# EAGLE board sdunit (EAGLE 6.5.0)
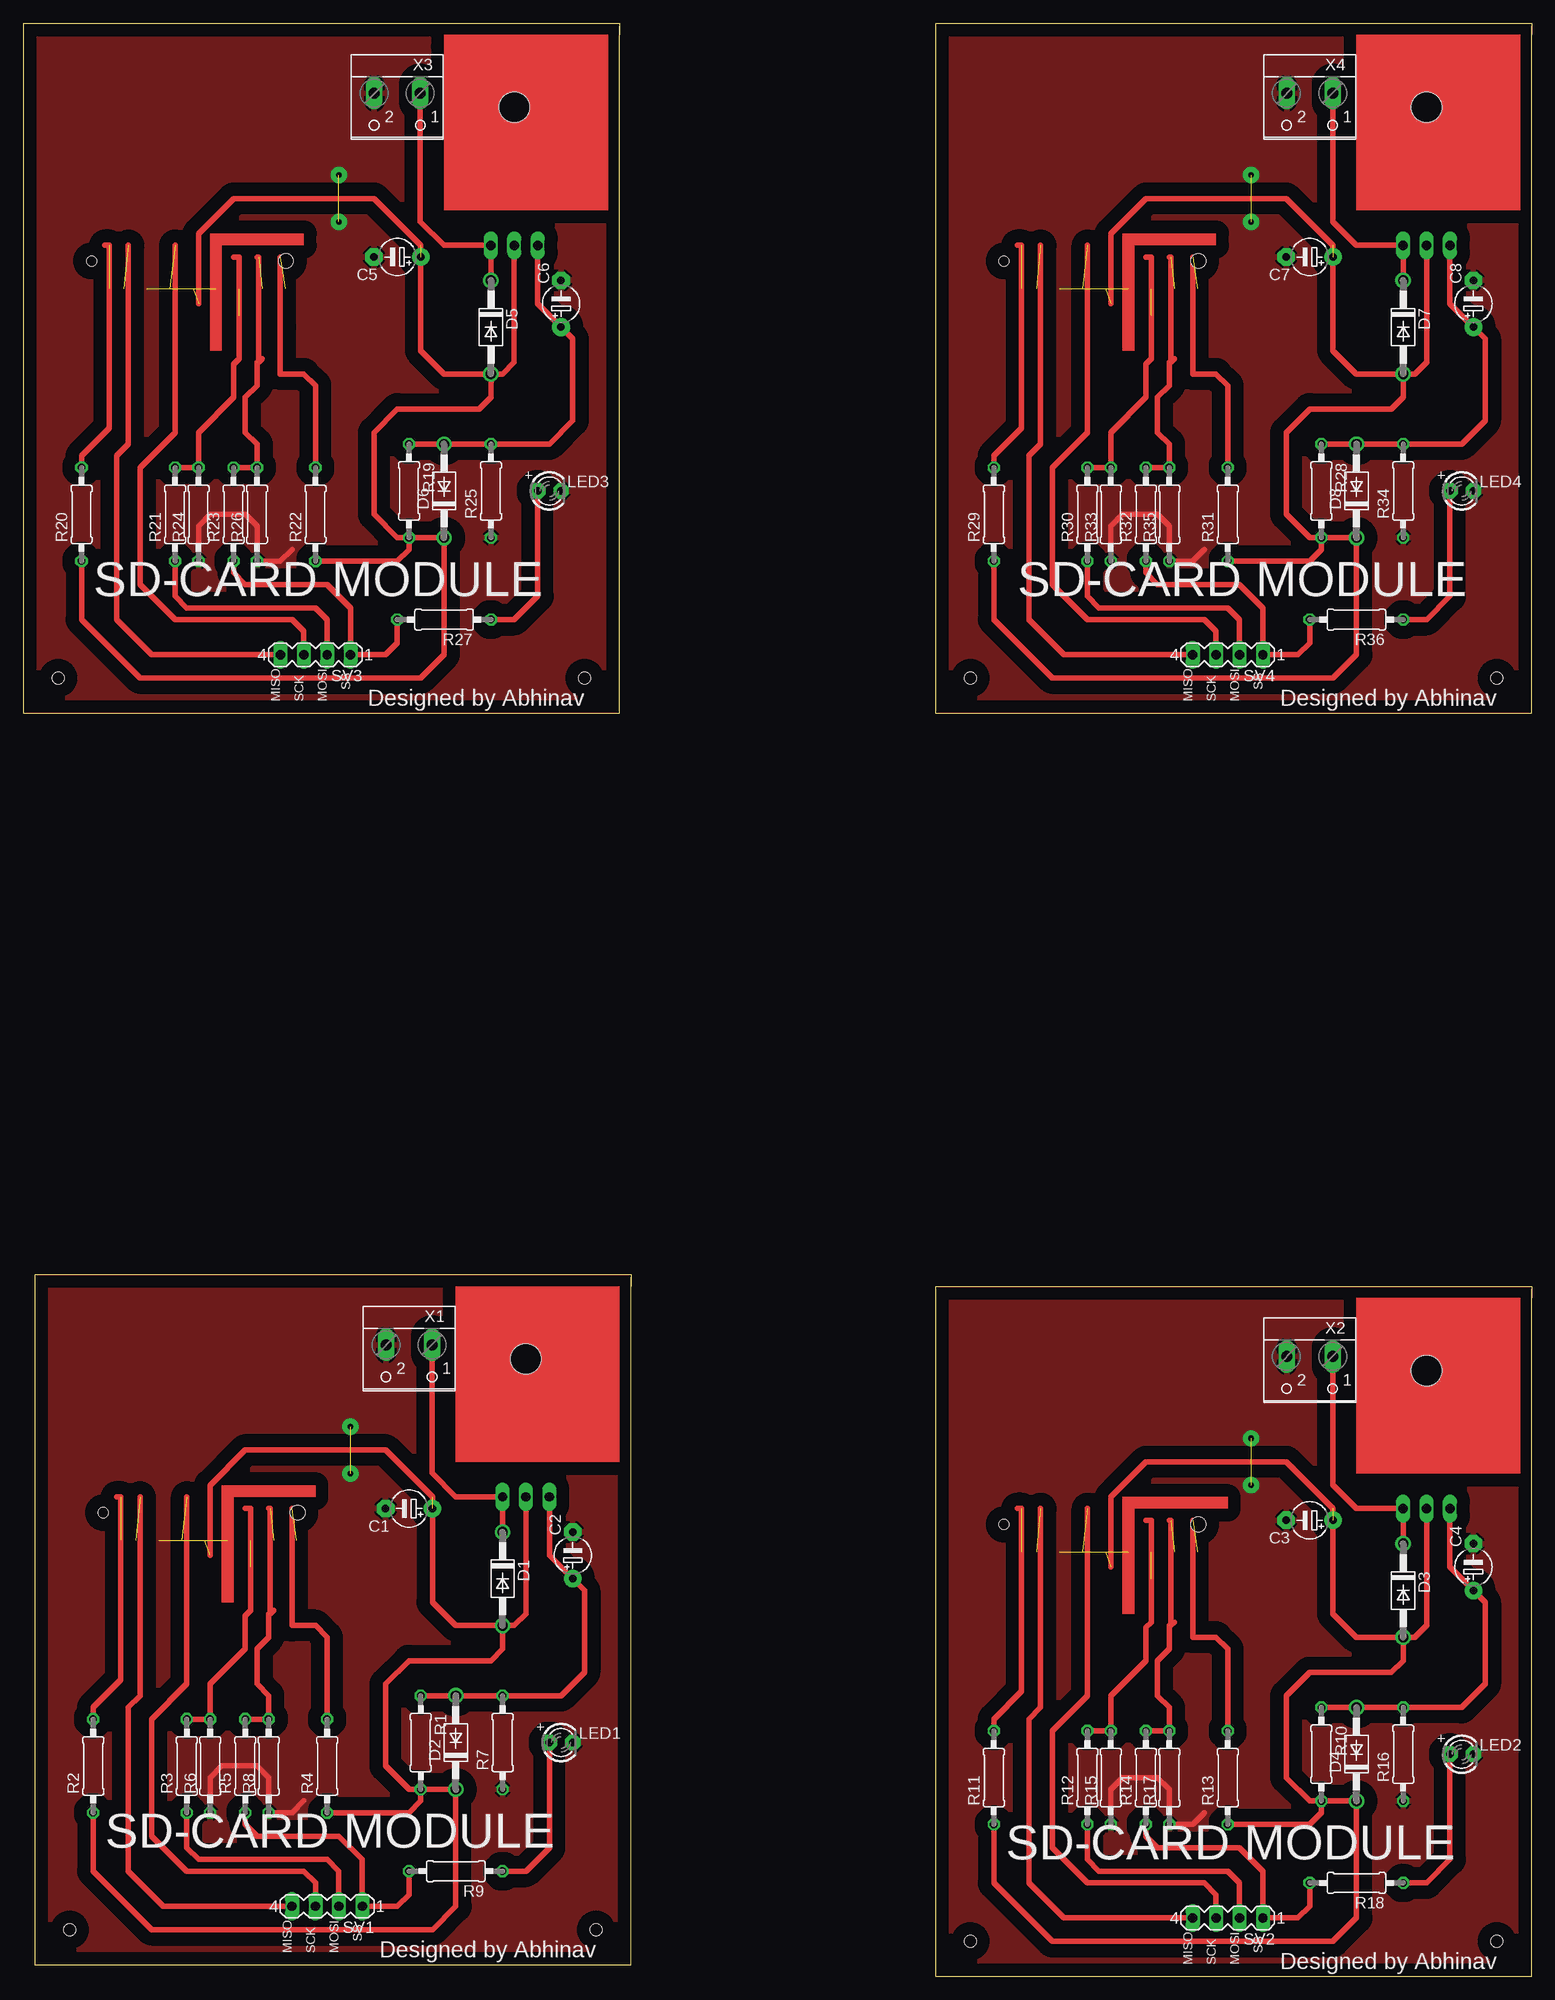
[diagram p0: board, top side]
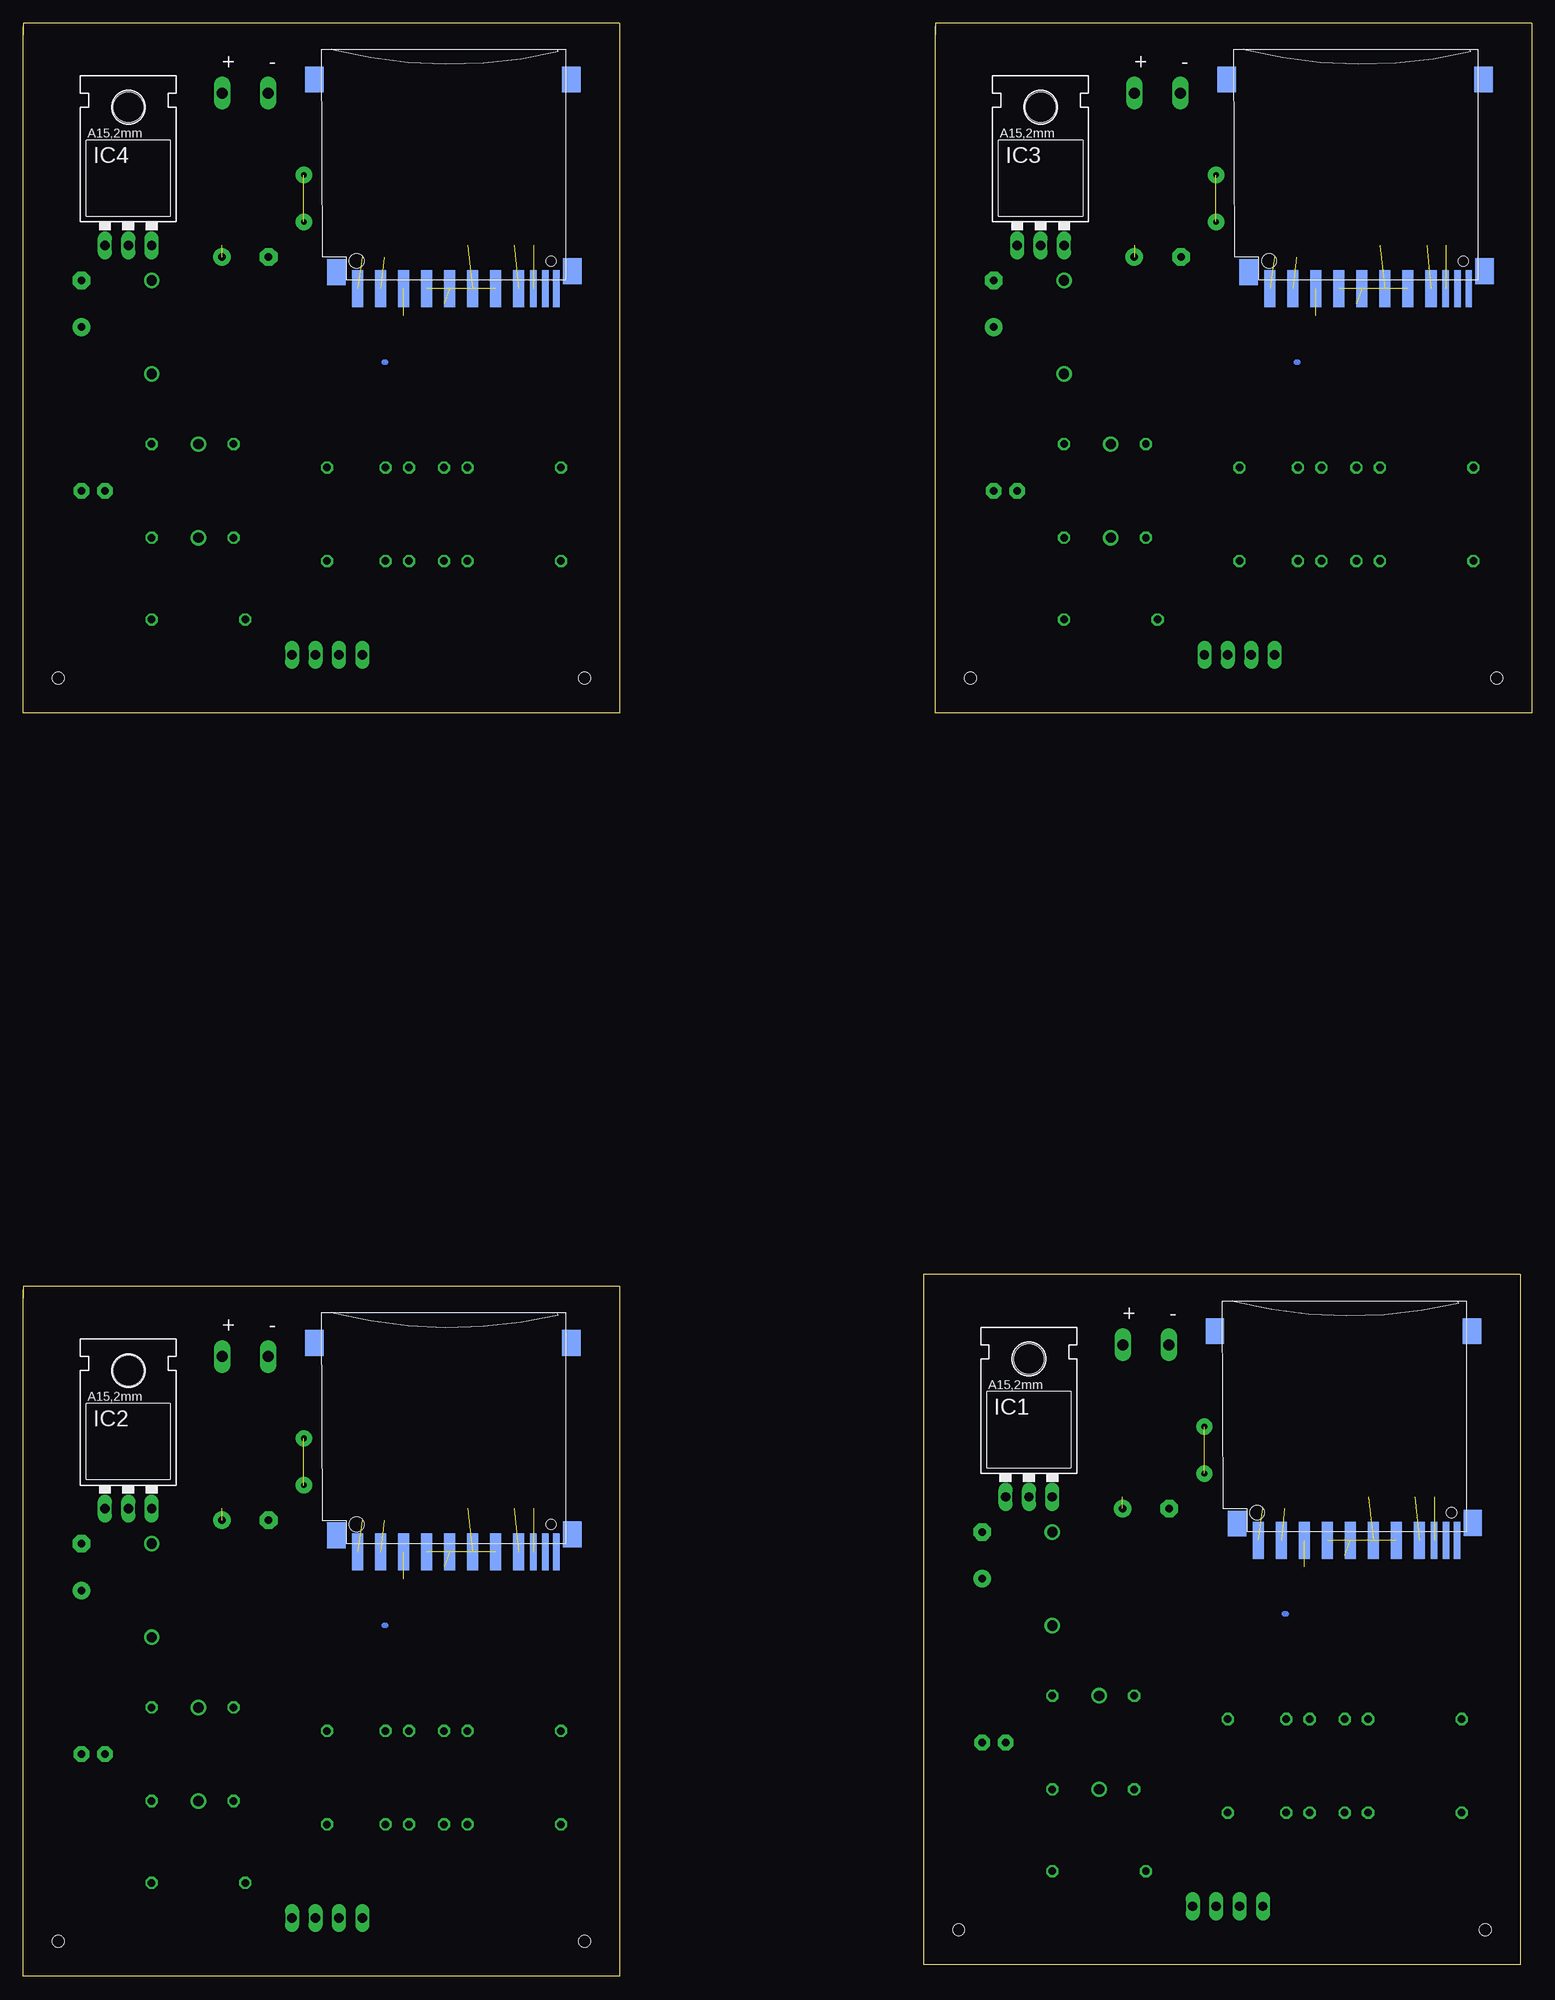
[diagram p1: board, bottom side, seen from below]

Size 163.83 x 212.09 mm. Coordinates in mm from the lower left corner, seen from the top.
Outline: 66.02,75.87 66.02,1.27 1.27,1.27 1.27,76.2 66.04,76.2 66.04,74.93
Outline: 163.81,74.6 163.81,0 99.06,0 99.06,74.93 163.83,74.93 163.83,73.66
Outline: 64.75,211.76 64.75,137.16 0,137.16 0,212.09 64.77,212.09 64.77,210.82
Outline: 163.81,211.76 163.81,137.16 99.06,137.16 99.06,212.09 163.83,212.09 163.83,210.82
Copper layers (1*16): Top 0.035mm / dielectric 1.5mm / Bottom 0.035mm
Design rules "default": minimum track width 10mil, minimum drill 24mil, track to track 8mil, track to pad 8mil, pad to pad 8mil, via to via 8mil, smd to smd 8mil, copper to edge 40mil, drill to drill 8mil, minimum pad ring 10mil, minimum via ring 8mil, stop-mask expansion 4mil, vias tented up to drill 0mil, thermal gap 10mil
Holes 1.3 mm at 5.08,5.08 62.23,5.08 102.87,3.81 160.02,3.81 3.81,140.97 60.96,140.97 102.87,140.97 160.02,140.97

## Footprints (pad centres in the part's own frame; a part is rotated, then mirrored left to right if it is on the bottom)
E5-4 = drill 0.813 pad 1.905: + -2.54,0 | drill 0.813 pad 1.905 octagon: - 2.54,0
DO41-10 = drill 1.118: A 5.08,0; C -5.08,0
TO220L1 = drill 1.016 long: 1 -2.54,-3.81; 2 0,-3.81; 3 2.54,-3.81 | hole 3.302: 0,11.176
LED3MM = drill 0.813 pad 1.676 octagon: A -1.27,0; K 1.27,0
0207/10 = drill 0.813 octagon: 1 -5.08,0; 2 5.08,0
MA04-1 = drill 1.016 long: 1 -3.81,0; 2 -1.27,0; 3 1.27,0; 4 3.81,0
06132 = smd 1.2 x 4: 1 6.9,0.9; 2 4.4,0.9; 3 1.9,0.9; 4 -0.6,0.9; 5 -3.1,0.9; 6 -5.6,0.9; 7 -8.1,0.9; 9 9.4,0.9 | smd 0.7 x 4: 8 -9.7,0.9; CD -11,0.9; WP -12.2,0.9 | smd 2 x 2.8: GP -13.8,-21.8; GP2 14.1,-21.8; GP3 11.7,-0.9; GP4 -13.9,-1 | hole 1.1: -11.6,-2.1 | hole 1.6: 9.5,-2.1
W237-102 = drill 1.194 long: 1 -2.5,-1.27; 2 2.5,-1.27

## Placement (x,y rotation side)
C1  0.1uf  [E5-4]  41.91,50.8 180 top
C2  0.1uf  [E5-4]  59.69,45.72 90 top
C3  0.1uf  [E5-4]  139.7,49.53 180 top
C4  0.1uf  [E5-4]  157.48,44.45 90 top
C5  0.1uf  [E5-4]  40.64,186.69 180 top
C6  0.1uf  [E5-4]  58.42,181.61 90 top
C7  0.1uf  [E5-4]  139.7,186.69 180 top
C8  0.1uf  [E5-4]  157.48,181.61 90 top
D1  1N4004  [DO41-10]  52.07,43.18 270 top
D2  1N4004  [DO41-10]  46.99,25.4 90 top
D3  1N4004  [DO41-10]  149.86,41.91 270 top
D4  1N4004  [DO41-10]  144.78,24.13 90 top
D5  1N4004  [DO41-10]  50.8,179.07 270 top
D6  1N4004  [DO41-10]  45.72,161.29 90 top
D7  1N4004  [DO41-10]  149.86,179.07 270 top
D8  1N4004  [DO41-10]  144.78,161.29 90 top
IC1  LM317MABT  [TO220L1]  54.61,55.88 0 bottom
IC2  LM317MABT  [TO220L1]  152.4,54.61 0 bottom
IC3  LM317MABT  [TO220L1]  53.34,191.77 0 bottom
IC4  LM317MABT  [TO220L1]  152.4,191.77 0 bottom
LED1  [LED3MM]  58.42,25.4 0 top
LED2  [LED3MM]  156.21,24.13 0 top
LED3  [LED3MM]  57.15,161.29 0 top
LED4  [LED3MM]  156.21,161.29 0 top
R1  220E  [0207/10]  43.18,25.4 270 top
R2  47k  [0207/10]  7.62,22.86 90 top
R3  22k  [0207/10]  17.78,22.86 90 top
R4  47k  [0207/10]  33.02,22.86 90 top
R5  22k  [0207/10]  24.13,22.86 90 top
R6  47k  [0207/10]  20.32,22.86 90 top
R7  360E  [0207/10]  52.07,25.4 90 top
R8  47k  [0207/10]  26.67,22.86 90 top
R9  220E  [0207/10]  46.99,11.43 180 top
R10  220E  [0207/10]  140.97,24.13 270 top
R11  47k  [0207/10]  105.41,21.59 90 top
R12  22k  [0207/10]  115.57,21.59 90 top
R13  47k  [0207/10]  130.81,21.59 90 top
R14  22k  [0207/10]  121.92,21.59 90 top
R15  47k  [0207/10]  118.11,21.59 90 top
R16  360E  [0207/10]  149.86,24.13 90 top
R17  47k  [0207/10]  124.46,21.59 90 top
R18  220E  [0207/10]  144.78,10.16 180 top
R19  220E  [0207/10]  41.91,161.29 270 top
R20  47k  [0207/10]  6.35,158.75 90 top
R21  22k  [0207/10]  16.51,158.75 90 top
R22  47k  [0207/10]  31.75,158.75 90 top
R23  22k  [0207/10]  22.86,158.75 90 top
R24  47k  [0207/10]  19.05,158.75 90 top
R25  360E  [0207/10]  50.8,161.29 90 top
R26  47k  [0207/10]  25.4,158.75 90 top
R27  220E  [0207/10]  45.72,147.32 180 top
R28  220E  [0207/10]  140.97,161.29 270 top
R29  47k  [0207/10]  105.41,158.75 90 top
R30  22k  [0207/10]  115.57,158.75 90 top
R31  47k  [0207/10]  130.81,158.75 90 top
R32  22k  [0207/10]  121.92,158.75 90 top
R33  47k  [0207/10]  118.11,158.75 90 top
R34  360E  [0207/10]  149.86,161.29 90 top
R35  47k  [0207/10]  124.46,158.75 90 top
R36  220E  [0207/10]  144.78,147.32 180 top
SV1  [MA04-1]  33.02,7.62 180 top
SV2  [MA04-1]  130.81,6.35 180 top
SV3  [MA04-1]  31.75,143.51 180 top
SV4  [MA04-1]  130.81,143.51 180 top
U$1  SDMMC06132  [06132]  20.32,48.26 180 bottom
U$2  SDMMC06132  [06132]  118.11,46.99 180 bottom
U$3  SDMMC06132  [06132]  19.05,184.15 180 bottom
U$4  SDMMC06132  [06132]  118.11,184.15 180 bottom
X1  [W237-102]  41.91,67.31 180 top
X2  [W237-102]  139.7,66.04 180 top
X3  [W237-102]  40.64,203.2 180 top
X4  [W237-102]  139.7,203.2 180 top

## Library data of the parts
C1-C8 R1-R36 = rcl
D1-D8 = diode
IC1-IC4 = v-reg
LED1-LED4 U$1-U$4 = adafruit
SV1-SV4 = con-lstb; OC_FARNELL: unknown; OC_NEWARK: unknown
X1-X4 = con-wago-500; MPN: 237-102; OC_FARNELL: unknown; OC_NEWARK: 70K9898

## Nets
GND1: C1.- C2.- LED1.K R6.1 R7.1 R8.1 X1.2
GND2: C3.- C4.- LED2.K R15.1 R16.1 R17.1 X2.2
GND3: C5.- C6.- LED3.K R24.1 R25.1 R26.1 X3.2
GND4: C7.- C8.- LED4.K R33.1 R34.1 R35.1 X4.2
N$1: D1.C IC1.3 X1.1
N$2: C2.+ D2.A IC1.1 R1.1 R7.2
N$3: R3.2 R6.2 U$1.2
N$4: R5.1 R9.2 SV1.1
N$5: R5.2 R8.2 U$1.1
N$6: SV1.4 U$1.7
N$7: R2.2 U$1.8
N$8: R4.2 U$1.9
N$9: R3.1 SV1.2
N$10: SV1.3 U$1.5
N$11: D3.C IC2.3 X2.1
N$12: C4.+ D4.A IC2.1 R10.1 R16.2
N$13: R12.2 R15.2 U$2.2
N$14: R14.1 R18.2 SV2.1
N$15: R14.2 R17.2 U$2.1
N$16: SV2.4 U$2.7
N$17: R11.2 U$2.8
N$18: R13.2 U$2.9
N$19: R12.1 SV2.2
N$20: SV2.3 U$2.5
N$21: D5.C IC3.3 X3.1
N$22: C6.+ D6.A IC3.1 R19.1 R25.2
N$23: R21.2 R24.2 U$3.2
N$24: R23.1 R27.2 SV3.1
N$25: R23.2 R26.2 U$3.1
N$26: SV3.4 U$3.7
N$27: R20.2 U$3.8
N$28: R22.2 U$3.9
N$29: R21.1 SV3.2
N$30: SV3.3 U$3.5
N$31: D7.C IC4.3 X4.1
N$32: C8.+ D8.A IC4.1 R28.1 R34.2
N$33: R30.2 R33.2 U$4.2
N$34: R32.1 R36.2 SV4.1
N$35: R32.2 R35.2 U$4.1
N$36: SV4.4 U$4.7
N$37: R29.2 U$4.8
N$38: R31.2 U$4.9
N$39: R30.1 SV4.2
N$40: SV4.3 U$4.5
S$1: LED2.A R18.1
S$2: LED1.A R9.1
S$3: LED3.A R27.1
S$4: LED4.A R36.1
VCC1: C1.+ D1.A D2.C IC1.2 R1.2 R2.1 R4.1 U$1.4
VCC2: C3.+ D3.A D4.C IC2.2 R10.2 R11.1 R13.1 U$2.4
VCC3: C5.+ D5.A D6.C IC3.2 R19.2 R20.1 R22.1 U$3.4
VCC4: C7.+ D7.A D8.C IC4.2 R28.2 R29.1 R31.1 U$4.4
VSS1: U$1.3 U$1.6
VSS2: U$2.3 U$2.6
VSS3: U$3.3 U$3.6
VSS4: U$4.3 U$4.6

## Tracks (layer width: path | path; a pad name or v marks a point on that pad's centre or on a via)
GND1  (via drill 0.6 pad 1.78)  (1 unrouted)
  Top 0.61: R6.1 20.32,21.59 21.59,22.86 25.4,22.86 26.67,21.59 R8.1 29.21,17.78 30.48,19.05
  other vias: 35.56,54.61 35.56,59.69
  pour Top (isolate 1.422): 1.27,76.2 1.27,1.27 66.04,1.27 66.04,76.2
GND2  (via drill 0.6 pad 1.78)  (1 unrouted)
  Top 0.61: R15.1 118.11,20.32 119.38,21.59 123.19,21.59 124.46,20.32 R17.1 127,16.51 128.27,17.78
  other vias: 133.35,53.34 133.35,58.42
  pour Top (isolate 1.422): 99.06,74.93 99.06,0 163.83,0 163.83,74.93
GND3  (via drill 0.6 pad 1.78)  (1 unrouted)
  Top 0.61: R24.1 19.05,157.48 20.32,158.75 24.13,158.75 25.4,157.48 R26.1 27.94,153.67 29.21,154.94
  other vias: 34.29,190.5 34.29,195.58
  pour Top (isolate 1.422): 0,212.09 0,137.16 64.77,137.16 64.77,212.09
GND4  (via drill 0.6 pad 1.78)  (1 unrouted)
  Top 0.61: R33.1 118.11,157.48 119.38,158.75 123.19,158.75 124.46,157.48 R35.1 127,153.67 128.27,154.94
  other vias: 133.35,190.5 133.35,195.58
  pour Top (isolate 1.422): 99.06,212.09 99.06,137.16 163.83,137.16 163.83,212.09
N$1
  Top 0.61: X1.1 44.41,54.65 46.99,52.07 IC1.3 D1.C
N$2
  Top 0.61: IC1.1 57.15,45.72 C2.+ 60.96,41.91 60.96,33.02 58.42,30.48 R7.2 D2.A R1.1
N$3  (1 unrouted)
  Top 0.61: R3.2 R6.2 20.32,31.75 24.13,35.56 24.13,39.15 24.72,39.74 24.72,44.45 24.72,50.8 24.13,50.8
N$4
  Top 0.61: R5.1 24.13,16.51 25.4,15.24 34.29,15.24 36.83,12.7 SV1.1 40.64,7.62 41.91,8.89 R9.2
N$5  (2 unrouted)
  Top 0.61: R5.2 R8.2 26.67,30.48 25.4,31.75 25.4,35.56 26.67,36.83 26.67,39.37 26.85,39.37 | 26.85,39.37 27.22,39.74 | 26.85,39.37 26.85,50.8 26.67,50.8
  Bottom 0.61: 26.67,39.37 26.85,39.37
N$6  (1 unrouted)
  Top 0.61: SV1.4 15.24,7.62 11.43,11.43 11.43,29.21 12.7,30.48 12.7,52.07
N$7  (1 unrouted)
  Top 0.61: R2.2 7.62,29.21 10.62,32.21 10.62,52.07 10.16,52.07
N$8  (1 unrouted)
  Top 0.61: R4.2 33.02,36.83 31.75,38.1 29.21,38.1 29.21,43.18 29.21,50.8
N$9
  Top 0.61: SV1.2 34.29,11.43 33.02,12.7 19.05,12.7 17.78,13.97 R3.1
N$10  (1 unrouted)
  Top 0.61: SV1.3 31.75,10.16 30.48,11.43 17.78,11.43 13.97,15.24 13.97,27.94 17.78,31.75 17.78,52.07
N$11
  Top 0.61: X2.1 142.2,53.38 144.78,50.8 IC2.3 D3.C
N$12
  Top 0.61: IC2.1 154.94,44.45 C4.+ 158.75,40.64 158.75,31.75 156.21,29.21 R16.2 D4.A R10.1
N$13  (1 unrouted)
  Top 0.61: R12.2 R15.2 118.11,30.48 121.92,34.29 121.92,37.88 122.51,38.47 122.51,43.18 122.51,49.53 121.92,49.53
N$14
  Top 0.61: R14.1 121.92,15.24 123.19,13.97 132.08,13.97 134.62,11.43 SV2.1 138.43,6.35 139.7,7.62 R18.2
N$15  (2 unrouted)
  Top 0.61: R14.2 R17.2 124.46,29.21 123.19,30.48 123.19,34.29 124.46,35.56 124.46,38.1 124.64,38.1 | 124.64,38.1 125.01,38.47 | 124.64,38.1 124.64,49.53 124.46,49.53
  Bottom 0.61: 124.46,38.1 124.64,38.1
N$16  (1 unrouted)
  Top 0.61: SV2.4 113.03,6.35 109.22,10.16 109.22,27.94 110.49,29.21 110.49,50.8
N$17  (1 unrouted)
  Top 0.61: R11.2 105.41,27.94 108.41,30.94 108.41,50.8 107.95,50.8
N$18  (1 unrouted)
  Top 0.61: R13.2 130.81,35.56 129.54,36.83 127,36.83 127,41.91 127,49.53
N$19
  Top 0.61: SV2.2 132.08,10.16 130.81,11.43 116.84,11.43 115.57,12.7 R12.1
N$20  (1 unrouted)
  Top 0.61: SV2.3 129.54,8.89 128.27,10.16 115.57,10.16 111.76,13.97 111.76,26.67 115.57,30.48 115.57,50.8
N$21
  Top 0.61: X3.1 43.14,190.54 45.72,187.96 IC3.3 D5.C
N$22
  Top 0.61: IC3.1 55.88,181.61 C6.+ 59.69,177.8 59.69,168.91 57.15,166.37 R25.2 D6.A R19.1
N$23  (1 unrouted)
  Top 0.61: R21.2 R24.2 19.05,167.64 22.86,171.45 22.86,175.04 23.45,175.63 23.45,180.34 23.45,186.69 22.86,186.69
N$24
  Top 0.61: R23.1 22.86,152.4 24.13,151.13 33.02,151.13 35.56,148.59 SV3.1 39.37,143.51 40.64,144.78 R27.2
N$25  (2 unrouted)
  Top 0.61: R23.2 R26.2 25.4,166.37 24.13,167.64 24.13,171.45 25.4,172.72 25.4,175.26 25.58,175.26 | 25.58,175.26 25.95,175.63 | 25.58,175.26 25.58,186.69 25.4,186.69
  Bottom 0.61: 25.4,175.26 25.58,175.26
N$26  (1 unrouted)
  Top 0.61: SV3.4 13.97,143.51 10.16,147.32 10.16,165.1 11.43,166.37 11.43,187.96
N$27  (1 unrouted)
  Top 0.61: R20.2 6.35,165.1 9.35,168.1 9.35,187.96 8.89,187.96
N$28  (1 unrouted)
  Top 0.61: R22.2 31.75,172.72 30.48,173.99 27.94,173.99 27.94,179.07 27.94,186.69
N$29
  Top 0.61: SV3.2 33.02,147.32 31.75,148.59 17.78,148.59 16.51,149.86 R21.1
N$30  (1 unrouted)
  Top 0.61: SV3.3 30.48,146.05 29.21,147.32 16.51,147.32 12.7,151.13 12.7,163.83 16.51,167.64 16.51,187.96
N$31
  Top 0.61: X4.1 142.2,190.54 144.78,187.96 IC4.3 D7.C
N$32
  Top 0.61: IC4.1 154.94,181.61 C8.+ 158.75,177.8 158.75,168.91 156.21,166.37 R34.2 D8.A R28.1
N$33  (1 unrouted)
  Top 0.61: R30.2 R33.2 118.11,167.64 121.92,171.45 121.92,175.04 122.51,175.63 122.51,180.34 122.51,186.69 121.92,186.69
N$34
  Top 0.61: R32.1 121.92,152.4 123.19,151.13 132.08,151.13 134.62,148.59 SV4.1 138.43,143.51 139.7,144.78 R36.2
N$35  (2 unrouted)
  Top 0.61: R32.2 R35.2 124.46,166.37 123.19,167.64 123.19,171.45 124.46,172.72 124.46,175.26 124.64,175.26 | 124.64,175.26 125.01,175.63 | 124.64,175.26 124.64,186.69 124.46,186.69
  Bottom 0.61: 124.46,175.26 124.64,175.26
N$36  (1 unrouted)
  Top 0.61: SV4.4 113.03,143.51 109.22,147.32 109.22,165.1 110.49,166.37 110.49,187.96
N$37  (1 unrouted)
  Top 0.61: R29.2 105.41,165.1 108.41,168.1 108.41,187.96 107.95,187.96
N$38  (1 unrouted)
  Top 0.61: R31.2 130.81,172.72 129.54,173.99 127,173.99 127,179.07 127,186.69
N$39
  Top 0.61: SV4.2 132.08,147.32 130.81,148.59 116.84,148.59 115.57,149.86 R30.1
N$40  (1 unrouted)
  Top 0.61: SV4.3 129.54,146.05 128.27,147.32 115.57,147.32 111.76,151.13 111.76,163.83 115.57,167.64 115.57,187.96
S$1
  Top 0.61: R18.1 152.4,10.16 154.94,12.7 LED2.A
S$2
  Top 0.61: R9.1 54.61,11.43 57.15,13.97 LED1.A
S$3
  Top 0.61: R27.1 53.34,147.32 55.88,149.86 LED3.A
S$4
  Top 0.61: R36.1 152.4,147.32 154.94,149.86 LED4.A
VCC1  (2 unrouted)
  Top 0.61: IC1.2 54.61,39.37 53.34,38.1 D1.A | R1.2 D2.C 46.99,7.62 44.45,5.08 13.97,5.08 7.62,11.43 R2.1 | R1.2 41.91,20.32 39.37,22.86 39.37,31.75 41.91,34.29 50.8,34.29 52.07,35.56 D1.A | R4.1 41.91,17.78 43.18,19.05 R1.2 | D1.A 46.99,38.1 44.45,40.64 44.45,52.07 39.37,57.15 24.13,57.15 20.32,53.34 20.32,45.72
VCC2  (2 unrouted)
  Top 0.61: IC2.2 152.4,38.1 151.13,36.83 D3.A | R10.2 D4.C 144.78,6.35 142.24,3.81 111.76,3.81 105.41,10.16 R11.1 | R10.2 139.7,19.05 137.16,21.59 137.16,30.48 139.7,33.02 148.59,33.02 149.86,34.29 D3.A | R13.1 139.7,16.51 140.97,17.78 R10.2 | D3.A 144.78,36.83 142.24,39.37 142.24,50.8 137.16,55.88 121.92,55.88 118.11,52.07 118.11,44.45
VCC3  (2 unrouted)
  Top 0.61: IC3.2 53.34,175.26 52.07,173.99 D5.A | R19.2 D6.C 45.72,143.51 43.18,140.97 12.7,140.97 6.35,147.32 R20.1 | R19.2 40.64,156.21 38.1,158.75 38.1,167.64 40.64,170.18 49.53,170.18 50.8,171.45 D5.A | R22.1 40.64,153.67 41.91,154.94 R19.2 | D5.A 45.72,173.99 43.18,176.53 43.18,187.96 38.1,193.04 22.86,193.04 19.05,189.23 19.05,181.61
VCC4  (2 unrouted)
  Top 0.61: IC4.2 152.4,175.26 151.13,173.99 D7.A | R28.2 D8.C 144.78,143.51 142.24,140.97 111.76,140.97 105.41,147.32 R29.1 | R28.2 139.7,156.21 137.16,158.75 137.16,167.64 139.7,170.18 148.59,170.18 149.86,171.45 D7.A | R31.1 139.7,153.67 140.97,154.94 R28.2 | D7.A 144.78,173.99 142.24,176.53 142.24,187.96 137.16,193.04 121.92,193.04 118.11,189.23 118.11,181.61
VSS1  (1 unrouted)
VSS2  (1 unrouted)
VSS3  (1 unrouted)
VSS4  (1 unrouted)
(copper drawn outside any net)
  shapes: Top area x32

## Text on the board
tPlace: SD-CARD MODULE | SD-CARD MODULE | SS | Designed by Abhinav | SS | Designed by Abhinav | MISO | SCK | MOSI | MISO | SCK | MOSI | SD-CARD MODULE | SD-CARD MODULE | SS | Designed by Abhinav | MISO | SCK | MOSI | SS | Designed by Abhinav | MISO | SCK | MOSI
bPlace: - | + | - | + | - | + | - | +